# EAGLE board Adapter-SOT223 (EAGLE 5.06)
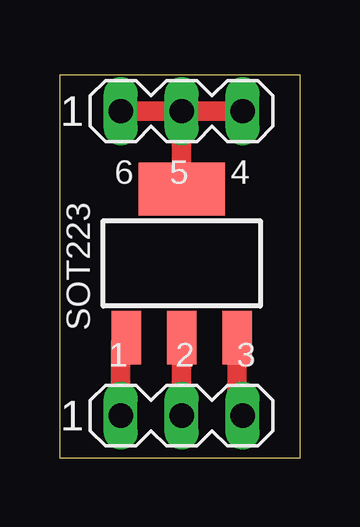
[diagram p0: board, top side]

Size 10 x 16 mm. Coordinates in mm from the lower left corner, seen from the top.
Outline: 0,0 0,16 10,16 10,0 0,0
Copper layers (1*16): Top 0.035mm / dielectric 1.5mm / Bottom 0.035mm
Design rules "PCB-POOL": minimum track width 6mil, minimum drill 12mil, track to track 6mil, track to pad 6mil, pad to pad 6mil, via to via 6mil, smd to smd 6mil, copper to edge 20mil, drill to drill 8mil, minimum pad ring 8mil, minimum via ring 6mil, stop-mask expansion 3mil, vias tented up to drill 0mil, thermal gap 8mil

## Footprints (pad centres in the part's own frame; a part is rotated, then mirrored left to right if it is on the bottom)
SOT223 = smd 1.219 x 2.235: 1 -2.311,-3.099; 2 0,-3.099; 3 2.311,-3.099 | smd 3.6 x 2.2: 4 0,3.099
MA03-1 = drill 1.016 long: 1 -2.54,0; 2 0,0; 3 2.54,0

## Placement (x,y rotation side)
E$1  [SOT223]  5.08,8.13 0 top
E$2  [MA03-1]  5.08,14.48 0 top
E$3  [MA03-1]  5.08,1.78 0 top

## Library data of the parts
E$1 = ref-packages
E$2 E$3 = con-lstb

## Nets
S$1: E$1.4 E$2.1 E$2.2 E$2.3
S$4: E$1.1 E$3.1
S$5: E$1.2 E$3.2
S$6: E$1.3 E$3.3

## Tracks (layer width: path | path; a pad name or v marks a point on that pad's centre or on a via)
S$1
  Top 0.813: E$2.1 E$2.2 | E$2.2 E$2.3 | E$2.2 E$1.4
S$4
  Top 0.813: E$3.1 2.54,4.8 E$1.1
S$5
  Top 0.813: E$3.2 E$1.2
S$6
  Top 0.813: E$1.3 7.39,2.01 E$3.3

## Text on the board
tNames: 6 | 5 | 4 | SOT223 | 1 | 2 | 3